# EAGLE board Solarbrain (EAGLE 6.2)
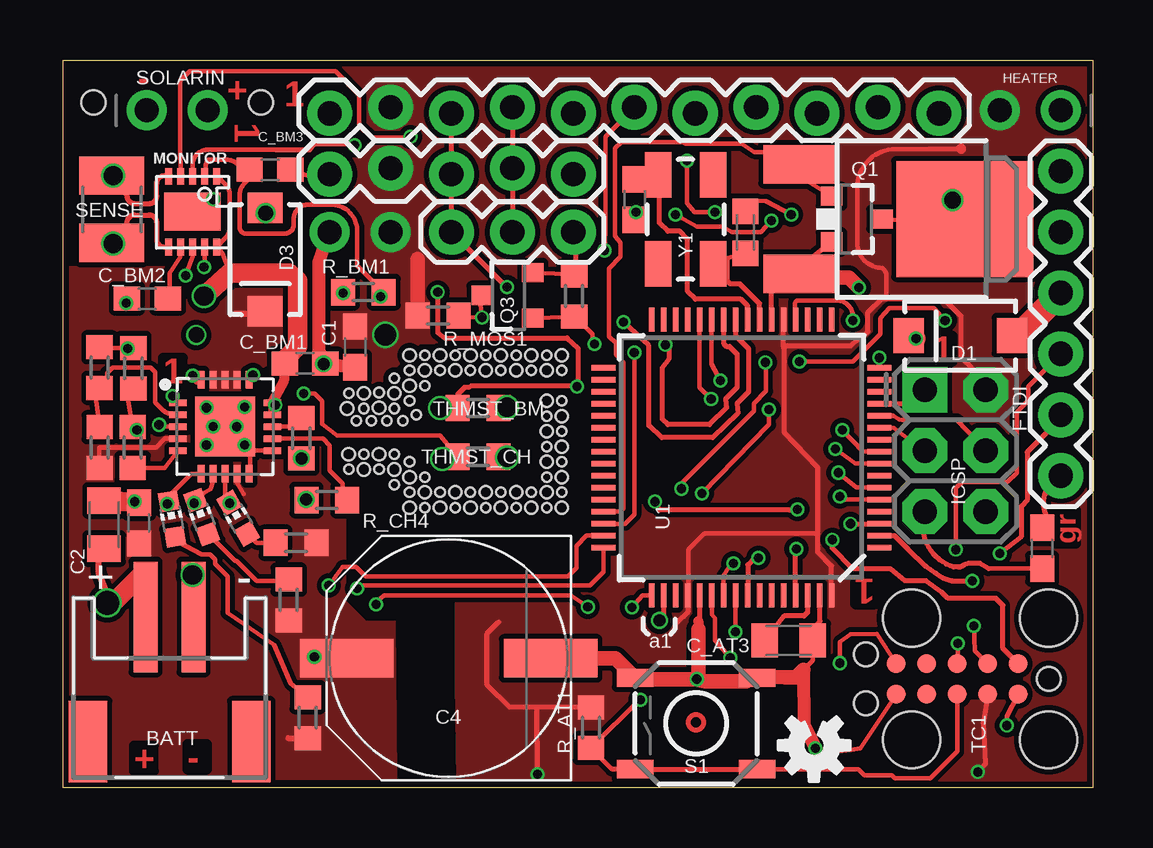
[diagram p0: board, top side]
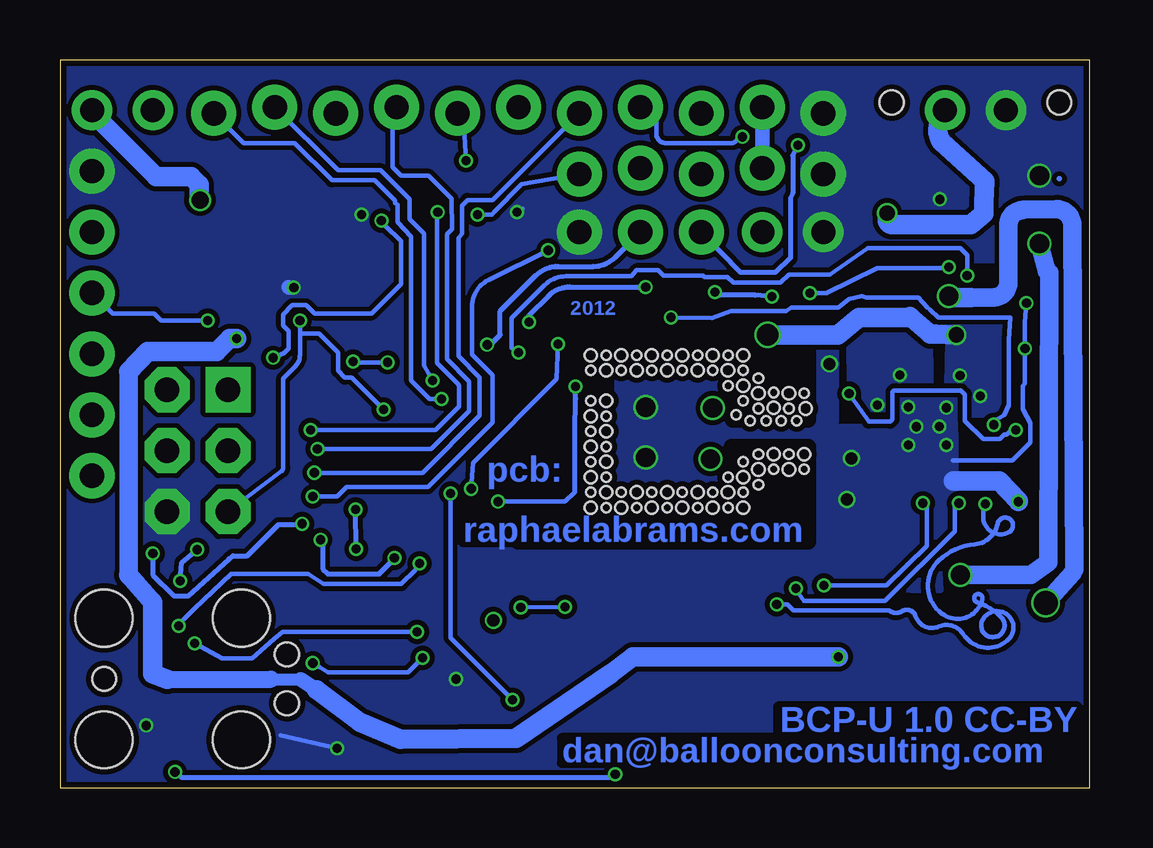
[diagram p1: board, bottom side, seen from below]

Size 42.93 x 30.35 mm. Coordinates in mm from the lower left corner, seen from the top.
Outline: 0,0 0,30.35 42.93,30.35 42.93,0 0,0
Copper layers (1*16): Top 0.035mm / dielectric 1.5mm / Bottom 0.035mm
Design rules: minimum track width 5mil, minimum drill 15mil, track to track 8mil, track to pad 8mil, pad to pad 8mil, via to via 8mil, smd to smd 0mil, copper to edge 10mil, drill to drill 7mil, minimum pad ring 8mil, minimum via ring 4mil, stop-mask expansion 3mil, vias tented up to drill 20mil, thermal gap 5mil
Net classes: 0 default: width 0.178 mm, drill 0.381 mm, clearance 0.178 mm; 1 power: width 0.178 mm, drill 0.381 mm, clearance 0.178 mm
Holes 0.38 mm at 19.53,12.33 20.16,11.69 18.89,11.69 18.26,12.33 16.99,12.33 15.72,12.33 15.08,11.69 17.62,11.69 20.16,12.96 20.16,14.23 14.45,12.33 20.16,15.5 20.16,18.04 18.89,18.04 18.26,17.41 16.35,11.69 17.62,18.04 16.35,18.04 15.08,18.04 14.45,17.41 14.45,16.14 14.45,13.6 15.72,17.41 16.99,17.41 19.53,17.41 13.81,15.82 12.54,15.82 13.81,13.92 12.54,13.92 13.81,17.09 13.81,12.65 20.8,17.41 20.8,16.14 20.8,14.87 20.8,13.6 20.8,12.33 13.18,16.49 11.91,16.46 11.91,13.28 13.18,13.28 15.08,12.96 15.08,16.77 14.16,15.31 14.73,15.57 12.22,15.31 12.86,15.31 13.49,15.31
Holes 0.51 mm at 17.62,12.33 16.35,12.33 15.08,12.33 18.89,12.33 18.26,11.69 16.99,11.69 20.16,12.33 14.45,11.69 14.45,12.96 15.72,11.69 20.16,13.6 20.16,16.14 19.53,18.04 20.16,17.41 18.89,17.41 18.26,18.04 17.62,17.41 19.53,11.69 16.35,17.41 15.72,18.04 16.99,18.04 15.08,17.41 14.45,16.77 13.81,16.46 14.45,18.04 13.81,13.28 13.18,15.85 13.18,13.92 20.16,14.87 20.8,18.04 20.8,15.5 20.8,14.23 20.8,12.96 20.8,11.69 11.84,15.82 11.91,13.92 12.54,16.46 12.54,13.28
Holes 1 mm at 1.27,28.57 8.26,28.57
tRestrict: 1 lines
bRestrict: area 11.7,10.3 to 23.8,19.5

## Footprints (pad centres in the part's own frame; a part is rotated, then mirrored left to right if it is on the bottom)
C0603 = smd 1.1 x 1: 1 -0.85,0; 2 0.85,0
JST-PH-2-SMT-RA = smd 1 x 4.6: 1 1,-3.7; 2 -1,-3.7 | smd 1.6 x 3.4: NC1 -3.4,1.5; NC2 3.4,1.5
C0805K = smd 1.1 x 1.4: 1 -1,0; 2 1,0
PANASONIC_G = smd 3.9 x 1.6: + 4.25,0; - -4.25,0
C0603K = smd 1.05 x 1.08: 1 -0.875,0; 2 0.875,0
CHIP-LED0603 = smd 0.8 x 0.8: A 0,-0.75; C 0,0.75
SMA-DIODE = smd 1.27 x 1.47: A -2.15,0; C 2.15,0
FTDI_BASIC = drill 1.016 pad 1.88: CTS 10.16,0; DTR 0,0; GND 12.7,0; RXI 2.54,0; TXO 5.08,0; VCC 7.62,0
1X02_ROUND = drill 1 pad 1.676: 1 -1.27,0; 2 1.27,0
QFN20_4MM = smd 0.73 x 0.28: P$1 -1.965,1; P$2 -1.965,0.5; P$3 -1.965,0; P$4 -1.965,-0.5; P$5 -1.965,-1; P$11 1.965,-1; P$12 1.965,-0.5; P$13 1.965,0; P$14 1.965,0.5; P$15 1.965,1 | smd 0.28 x 0.73: P$6 -1,-1.965; P$7 -0.5,-1.965; P$8 0,-1.965; P$9 0.5,-1.965; P$10 1,-1.965; P$16 1,1.965; P$17 0.5,1.965; P$18 0,1.965; P$19 -0.5,1.965; P$20 -1,1.965 | smd 2.5 x 2.5: P$21 0,0
2X3-NS = drill 1.016 pad 1.88 square: 1 -2.54,-1.27 | drill 1.016 pad 1.88 octagon: 2 -2.54,1.27; 3 0,-1.27; 4 0,1.27; 5 2.54,-1.27; 6 2.54,1.27
1X03 = drill 1.016 pad 1.88: 1 0,0; 2 2.54,0; 3 5.08,0
1X11_LOCK = drill 1.016 pad 1.88: 1 0,0.127; 2 2.54,-0.127; 3 5.08,0.127; 4 7.62,-0.127; 5 10.16,0.127; 6 12.7,-0.127; 7 15.24,0.127; 8 17.78,-0.127; 9 20.32,0.127; 10 22.86,-0.127; 11 25.4,0.127
1X05_LOCK = drill 1.016 pad 1.88: 1 0,0.127; 2 2.54,-0.127; 3 5.08,0.127; 4 7.62,-0.127; 5 10.16,0.127
TDFN_10_3X3MM = smd 0.7 x 0.295: P$1 -1.5,1; P$2 -1.5,0.5; P$3 -1.5,0; P$4 -1.5,-0.5; P$5 -1.5,-1; P$6 1.45,-1; P$7 1.45,-0.5; P$8 1.45,0; P$9 1.45,0.5; P$10 1.45,1 | smd 1.58 x 2.35: P$11 -0.025,0
SOT23-3 = smd 0.8 x 0.9: 1 -0.95,-1; 2 0.95,-1; 3 0,1.1
DPAK = smd 1.6 x 3: 1 -2.28,-5.31; 3 2.28,-5.31 | smd 4.826 x 5.715: 4 0,1.588
R0603 = smd 1 x 1.1: 1 -0.85,0; 2 0.85,0
TACTILE_SWITCH_SMD = smd 1.524 x 0.762: 1 -2.54,1.905; 2 2.54,1.905; 3 -2.54,-1.905; 4 2.54,-1.905
R3225 = smd 1.6 x 2.7: 1 -1.4,0; 2 1.4,0
TC2050-IDC = smd 0.787 x 0.787: 1 -2.54,-0.635; 2 -2.54,0.635; 3 -1.27,-0.635; 4 -1.27,0.635; 5 0,-0.635; 6 0,0.635; 7 1.27,-0.635; 8 1.27,0.635; 9 2.54,-0.635; 10 2.54,0.635 | hole 0.991: -3.81,0; 3.81,1.016; 3.81,-1.016 | hole 2.375: -3.81,2.54; -3.81,-2.54; 1.905,2.54; 1.905,-2.54
TQFP64 = smd 0.22 x 1: 1 -3.75,-5.75; 2 -3.25,-5.75; 3 -2.75,-5.75; 4 -2.25,-5.75; 5 -1.75,-5.75; 6 -1.25,-5.75; 7 -0.75,-5.75; 8 -0.25,-5.75; 9 0.25,-5.75; 10 0.75,-5.75; 11 1.25,-5.75; 12 1.75,-5.75; 13 2.25,-5.75; 14 2.75,-5.75; 15 3.25,-5.75; 16 3.75,-5.75; 33 3.75,5.75; 34 3.25,5.75; 35 2.75,5.75; 36 2.25,5.75; 37 1.75,5.75; 38 1.25,5.75; 39 0.75,5.75; 40 0.25,5.75; 41 -0.25,5.75; 42 -0.75,5.75; 43 -1.25,5.75; 44 -1.75,5.75; 45 -2.25,5.75; 46 -2.75,5.75; 47 -3.25,5.75; 48 -3.75,5.75 | smd 1 x 0.22: 17 5.75,-3.75; 18 5.75,-3.25; 19 5.75,-2.75; 20 5.75,-2.25; 21 5.75,-1.75; 22 5.75,-1.25; 23 5.75,-0.75; 24 5.75,-0.25; 25 5.75,0.25; 26 5.75,0.75; 27 5.75,1.25; 28 5.75,1.75; 29 5.75,2.25; 30 5.75,2.75; 31 5.75,3.25; 32 5.75,3.75; 49 -5.75,3.75; 50 -5.75,3.25; 51 -5.75,2.75; 52 -5.75,2.25; 53 -5.75,1.75; 54 -5.75,1.25; 55 -5.75,0.75; 56 -5.75,0.25; 57 -5.75,-0.25; 58 -5.75,-0.75; 59 -5.75,-1.25; 60 -5.75,-1.75; 61 -5.75,-2.25; 62 -5.75,-2.75; 63 -5.75,-3.25; 64 -5.75,-3.75
CRYSTAL-SMD-5X3 = smd 1.9 x 1.1: 1 -1.85,-1.15; 2 1.85,-1.15; 3 1.85,1.15; 4 -1.85,1.15

## Placement (x,y rotation side)
AUTORESET  .1uf  [C0603]  40.81,9.99 90 top
BATT  [JST-PH-2-SMT-RA]  4.45,3.43 180 top
C1  10uF  [C0603]  12.17,18.39 270 top
C2  10uF  [C0805K]  1.71,10.98 90 top
C3  10uF/10V  [C0603]  3.17,11.05 90 top
C4  4700uF/10V  [PANASONIC_G]  16.08,5.41 180 top
C_AT1  22pf  [C0603K]  28.45,23.17 90 top
C_AT2  22pf  [C0603]  23.83,24.53 270 top
C_AT3  10uF  [C0805K]  30.25,6.15 0 top
C_BM1  .1uF/10V  [C0603]  10.09,17.69 0 top
C_BM2  .1uF/10V  [C0603]  3.52,20.41 180 top
C_BM3  10uF/10V  [C0603]  8.63,25.77 0 top
CHRG/LBO  ORANGE  [CHIP-LED0603]  7.3,11.24 30 top
D1  1amp  [SMA-DIODE]  37.4,18.86 180 top
D3  3amp  [SMA-DIODE]  8.43,22.03 270 top
DONE  GREEN  [CHIP-LED0603]  5.78,11.29 20 top
FTDI  FTDI_BASICPTH  [FTDI_BASIC]  41.59,13.02 90 top
HEATER  [1X02_ROUND]  40.32,28.26 180 top
IC1  MCP73871  [QFN20_4MM]  6.76,15.06 0 top
ICSP  AVR_SPI_PRG_6NS  [2X3-NS]  37.19,14.06 270 top
JP1  [1X03]  21.27,23.18 180 top
JP3  M11LOCK  [1X11_LOCK]  36.51,28.26 180 top
JP8  [1X05_LOCK]  21.27,25.72 180 top
LOAD  [1X02_ROUND]  12.38,23.18 180 top
MONITOR  MAX17047_17050_BATTERY_GAS_GAUGE  [TDFN_10_3X3MM]  5.4,24 270 top
PWR  RED  [CHIP-LED0603]  4.54,11.21 10 top
Q1  MOSFET-NCHANNELSMD  [SOT23-3]  33.04,23.72 270 top
Q2  MOSFET-NCHANNELFDD8580  [DPAK]  36,23.72 270 top
Q3  MOSFET-NCHANNELSMD  [SOT23-3]  18.57,20.54 90 top
R_AT1  1K  [R0603]  22.01,2.52 90 top
R_BM1  1K  [R0603]  12.52,20.67 180 top
R_CH1  270K  [R0603]  1.53,14.2 270 top
R_CH2  100K  [R0603]  1.52,17.53 90 top
R_CH3  1k  [R0603]  9.94,14.58 90 top
R_CH4  100K  [R0603]  10.99,12 0 top
R_CH5  1K  [R0603]  2.9,14.19 90 top
R_CH6  150K  [R0603]  2.93,17.5 270 top
R_LED1  1K  [R0603]  9.71,10.23 0 top
R_LED2  1K  [R0603]  9.41,7.84 270 top
R_LED3  1K  [R0603]  10.2,2.93 270 top
R_MOS1  1K  [R0603]  15.63,19.7 180 top
R_MOS2  1K  [R0603]  21.3,20.51 270 top
S1  [TACTILE_SWITCH_SMD]  26.39,2.69 180 top
SENSE  [R3225]  2.03,24.13 270 top
SOLARIN  DCIN  [1X02_ROUND]  4.76,28.26 0 top
TC1  TC2050-IDC  [TC2050-IDC]  37.28,4.55 180 top
THMST_BM  [R0603]  17.3,15.84 0 top
THMST_CH  [R0603]  17.3,13.81 180 top
U1  ATMEGA128_SMD  [TQFP64]  28.29,13.77 90 top
U$1  [OSHW-LOGO-S]  31.31,1.78 180 top
Y1  [CRYSTAL-SMD-5X3]  25.95,23.71 270 top

## Library data of the parts
AUTORESET BATT C1-C4 C_AT1-C_AT3 C_BM1-C_BM3 CHRG/LBO DONE IC1 PWR R_AT1 R_BM1 R_CH1-R_CH6 R_LED1-R_LED3 R_MOS1 R_MOS2 = adafruit
D1 D3 FTDI ICSP JP1 JP3 JP8 Q1-Q3 S1 U1 U$1 Y1 = SparkFun2011
HEATER LOAD SOLARIN = microbuilder
MONITOR = RaphaelBigLibrary
SENSE THMST_BM THMST_CH = rcl
TC1 = TagConnect

## Nets
3.3V [power]: C1.1 HEATER.2 IC1.P$1 IC1.P$20 ICSP.2 JP3.10 JP8.4 LOAD.1 R_AT1.2 R_MOS1.2 TC1.4 U1.21 U1.52 U1.64
#PG: IC1.P$6 PWR.C U1.49
BATT [power]: BATT.1 C2.1 C_BM1.1 IC1.P$14 IC1.P$15 IC1.P$16 MONITOR.P$1 MONITOR.P$10
CSP [power]: BATT.2 MONITOR.P$6 SENSE.2
DTR [power]: AUTORESET.2 FTDI.DTR
GND [power]: C1.2 C2.2 C3.2 C4.- C_AT1.2 C_AT2.2 C_AT3.2 C_BM1.2 C_BM2.2 C_BM3.2 FTDI.GND IC1.P$10 IC1.P$11 IC1.P$21 ICSP.6 JP1.1 JP3.11 JP8.5 LOAD.2 MONITOR.P$5 MONITOR.P$11 Q1.2 Q2.3 Q3.2 R_CH2.2 R_CH3.1 R_CH4.1 R_CH6.1 R_MOS2.1 S1.3 S1.4 SENSE.1 SOLARIN.1 TC1.2 TC1.10 THMST_BM.2 THMST_CH.1 U1.22 U1.53 U1.63
MISO [power]: ICSP.1 U1.13
MOSI [power]: ICSP.4 U1.12
N$2 [power]: D1.A FTDI.VCC Q3.1 R_MOS2.2
N$3 [power]: C_AT1.1 U1.23 Y1.3
N$5: IC1.P$5 R_CH5.1
N$8: R_CH5.2 R_CH6.2 THMST_CH.2
N$9 [power]: C_AT2.1 U1.24 Y1.1
N$12: CHRG/LBO.A R_LED1.1
N$13: DONE.A R_LED2.1
N$14: PWR.A R_LED3.1
N$19 [power]: MONITOR.P$8 U1.46
N$20 [power]: C_AT3.1 U1.62
N$21 [power]: HEATER.1 Q1.3 Q2.4
N$22 [power]: MONITOR.P$9 R_BM1.2
N$24 [power]: D3.A SOLARIN.2
N$26 [power]: C_BM2.1 MONITOR.P$7
PROG1: IC1.P$13 R_CH3.2
PROG3: IC1.P$12 R_CH4.2
PWR_EN: JP3.3
RESET [power]: AUTORESET.1 ICSP.5 R_AT1.1 S1.1 S1.2 TC1.6 U1.20
RX [power]: FTDI.RXI U1.3
SAT_CTS: JP3.7 U1.6
SAT_NA [power]: JP3.5 U1.9
SAT_RI [power]: JP3.4 U1.8
SAT_RTS [power]: JP3.6 U1.5
SCK [power]: ICSP.3 U1.11
SCL [power]: JP1.3 JP3.9 JP8.3 MONITOR.P$3 U1.25
SDA [power]: JP1.2 JP3.8 JP8.2 MONITOR.P$4 U1.26
SEL [power]: IC1.P$3 Q3.3 R_MOS1.1
SER_FROM_SAT: JP3.2 U1.27
SER_TO_SAT: JP3.1 U1.28
SLEEP: JP8.1 U1.16
STAT1: CHRG/LBO.C IC1.P$8 U1.47
STAT2: DONE.C IC1.P$7 U1.48
TCK [power]: TC1.1 U1.57
TDI [power]: TC1.9 U1.54
TDO [power]: TC1.3 U1.55
THE_HEAT_ON [power]: Q1.1 Q2.1 U1.45
THERM_ANALOG [power]: C_BM3.1 MONITOR.P$2 R_BM1.1 THMST_BM.1 U1.61
TMS [power]: TC1.5 U1.56
TX [power]: FTDI.TXO U1.2
VCC [power]: C3.1 C4.+ D1.C D3.C IC1.P$4 IC1.P$9 IC1.P$17 IC1.P$18 IC1.P$19 R_CH1.2 R_LED1.2 R_LED2.2 R_LED3.2
VPCC: IC1.P$2 R_CH1.1 R_CH2.1

## Tracks (layer width: path | path; a pad name or v marks a point on that pad's centre or on a via)
3.3V  (via drill 0.38, 0.64, 0.9)
  Top 0.178: 26.07,7.99 26.07,9.94 26.73,10.6 31.37,10.6 31.46,10.51 | 36.1,26.64 34.7,26.64 arc90 33.12,25.05 33.12,22.7 arc90 34.13,21.68 34.14,21.68 arc-45 34.32,21.42 34.32,20.41
  Top 0.203: R_AT1.2 19.75,3.37 | 19.75,3.37 18.6,3.37 17.68,4.29 17.68,6.45 18.16,6.92 | 25.62,6.92 26.07,7.37 26.07,7.99 U1.52 | 37.43,26.64 36.1,26.64 | 30.04,18.45 U1.21 | U1.64 32.04,9.27 31.46,9.84 31.46,10.51 31.46,13.37 30.07,14.83 30.07,18.29 30.04,18.45 | 30.04,18.45 32.83,18.45 33.56,19.02 33.56,19.84 34.13,20.41 34.32,20.41 36.7,20.41 37.43,19.68 37.43,17.97 37.88,17.53 37.88,17.19 ICSP.2 | TC1.4 38.35,2.7 38.45,1.02 v38.13,0.67 | v19.78,0.57 19.75,3.37
  Top 0.305: IC1.P$20 5.6,16.97 v5.41,17.19 | IC1.P$1 4.66,16.09 v4.57,16.35
  Top 0.406: 37.43,26.64 37.43,26.67
  Top 0.61: R_MOS1.2 14.78,22.05
  Top 0.813: R_MOS1.2 14.71,19.79
  Bottom 0.178: 13.68,28.42 JP3.10
  Bottom 0.203: v38.13,0.67 37.85,0.45 20,0.45 v19.78,0.57
  Bottom 0.406: 13.68,28.42 13.72,28.38
  Bottom 0.61: JP3.10 JP8.4
  Bottom 0.813: v13.43,18.89 10.51,18.89 9.62,19.62 7.49,19.62 7.49,19.65 6.64,18.92 6.45,18.92 v5.56,18.89
  pour Bottom (no thermals): 0.73,21.52 5.88,21.44 5.97,16.81 5.18,16.81 4.94,16.49 4.94,15.54 0.71,15.53 0.71,17.43
  pour Top (isolate 0.203, no thermals): 17.75,0.29 16.45,0.25 16.38,4.41 16.38,9.65 17.75,11.02 20.95,11.02 21.81,11.87 21.81,17.62 20.89,18.54 14.89,18.54 12.76,16.41 11.21,16.41 11.21,16.92 11.18,21.27 9.4,22.96 9.33,28.92 10.7,30.29 42.83,30.29 42.89,30.23 42.89,0.19 42.77,0.06 18.48,0.06 18.26,0.29
#PG  (via drill 0.38)
  Top 0.178: IC1.P$6 5.35,13.1 4.51,12.26 4.51,11.95 PWR.C 4.46,11.94 v4.35,11.84 | U1.49 24.15,8.02 v23.72,7.53 | v21.88,7.56 21.18,8.03 13.38,8.02 13.24,7.91 v13.05,7.65
  Bottom 0.178: v23.72,7.53 v21.88,7.56 | v13.05,7.65 12.61,7.65 12.35,7.4 8.35,7.4 arc-77 7.84,7.37 arc107 7.27,7.18 arc-95 6.29,6.73 arc81 5.27,6.41 arc-104 3.37,6.22 arc-198 4.48,6.99 arc-249 3.68,7.11 arc-29 4.7,7.75 arc265 4.48,7.87 arc109 6.06,7.21 arc106 6.29,9.49 arc37 4.79,10.16 arc-73 3.84,11.02 arc229 3.37,10.67 arc119 4.45,11.3 4.45,11.95 4.47,11.95 v4.35,11.84
BATT  (via drill 0.38, 0.8, 1)
  Top 0.178: v8.85,15.97 IC1.P$14 | 6.95,21.46 6.73,22.05 arc36 6.55,22.4 MONITOR.P$10 6.77,22.92 arc45 6.95,23.37 6.95,24.72 arc45 6.77,25.17 6.44,25.5 MONITOR.P$1
  Top 0.254: C2.1 1.42,9.93 1.39,10.08 1.49,10.06 1.49,8.98 1.77,8.26 v1.84,7.72
  Top 0.305: IC1.P$16 7.75,17.06 v7.92,17.22 | IC1.P$14 IC1.P$15
  Top 0.406: 9.21,17.6 9.21,16.99 IC1.P$15
  Top 0.762: BATT.1 3.41,9.03 2.24,7.86 arc9 1.85,7.57 v1.84,7.72
  Top 0.813: C_BM1.1 9.21,17.6 9.21,17.84 9.78,18.41 9.78,21.14 9.43,21.46 6.95,21.46 v5.87,20.51
  Bottom 0.178: 5.82,20.46 v5.87,20.51
  Bottom 0.762: v1.84,7.72 0.73,8.96 0.64,9.11 0.73,23.42 arc-90 1.36,24.14 2.76,24.1 arc-90 3.39,23.47 3.39,21.09 arc90 3.99,20.46 4.95,20.46
  Bottom 0.813: 4.95,20.46 5.82,20.46
  pour Bottom (no thermals): 6.6,16.81 6.64,21.44 9.18,21.44 arc-45 9.63,21.26 9.93,21.34 arc-45 10.11,20.89 10.01,15.78 8.43,15.78 8.43,16.81 7.08,16.81
CSP  (via drill 0.8)
  Top 0.203: SENSE.2 2.67,23.57 arc-90 2.98,23.89 3.59,23.89 arc-90 3.9,23.57 3.9,22.86 arc91 4.26,22.55 MONITOR.P$6
  Top 0.254: BATT.2 5.44,7.14 5.44,8.87 v5.41,8.89 v5.4,8.89
  Top 0.762: v2.1,22.7 SENSE.2
  Bottom 0.762: v5.4,8.89 2.46,8.89 1.73,9.4 1.7,21.48 arc-7 1.78,21.56 v2.1,22.7
DTR
  Top 0.203: AUTORESET.2 41,11.32 arc-90 FTDI.DTR
GND  (via drill 0.38, 0.5, 0.8)
  Top 0.178: IC1.P$11 7.8,14.06 | 7.8,14.06 v7.57,14.3 | TC1.10 33.24,1.65 arc-23 v31.37,1.65 | v39.34,2.6 39.34,2.99 TC1.2 | 7.8,14.06 7.8,13.14 IC1.P$10 | Q3.2 21.39,21.4 R_MOS2.1 | C_BM1.2 10.85,17.63 v10.86,17.68 | v9.94,13.75 R_CH3.1 | R_CH4.1 10.14,12.02 v10.13,12.03 | C_BM3.2 10.27,25.52 JP8.5 | C_AT1.2 28.7,24.48 29.31,24.48 v30.35,23.91 | C_AT2.2 23.83,24.02 v23.88,24 | v2.63,20.23 2.57,20.26 C_BM2.2 | R_CH6.1 2.77,18.19 | 2.77,18.19 2.77,18.15 | 2.77,18.19 2.68,18.28 2.68,18.32 2.77,18.32 | v2.7,18.32 2.93,18.59 R_CH6.1 | R_CH2.2 1.55,18.35 R_CH6.1 | 31.56,6.95 31.25,6.65 C_AT3.2 31.25,5.31 30.86,4.92
  Top 0.203: SENSE.1 2.67,24.69 arc90 2.98,24.37 3.62,24.37 arc90 3.9,24.69 3.9,25.21 arc-95 4.28,25.53 MONITOR.P$5 | v5.98,14.3 IC1.P$21 | MONITOR.P$11 5.25,23.77 v6.25,24.54 | C_BM2.2 2.73,20.57 | U1.53 26.54,6.96 26.48,6.95 | 31.56,6.95 31.56,8 U1.63 | U1.22 29.54,20.7 Q2.3 30.17,21.28 Q1.2 | 23.85,23.95 C_AT2.2 | 21.39,21.4 21.36,23.09 | THMST_BM.2 v18.51,15.88 | THMST_CH.1 18.48,13.81 v18.51,13.78
  Top 0.254: 9.27,25.73 C_BM3.2
  Top 0.3: IC1.P$21 7.1,15.6
  Top 0.406: 26.48,6.95 26.48,6.6 | 21.36,23.09 21.27,23.09 JP1.1
  Top 0.533: 30.86,4.92 30.89,2.63 v31.37,1.65 | LOAD.2 10.67,21.94 10.67,18.19 C_BM1.2 C1.2
  Top 0.61: 2.71,20.41 C_BM2.2 | C4.- 23.03,5.41 S1.4 24.1,4.54 26.07,4.54 26.35,4.53 | 26.35,4.53 26.77,4.45 28.48,4.45 S1.3 29.01,4.63 30.1,4.6 30.54,4.6 30.86,4.92 | 26.48,6.6 26.48,4.75 26.35,4.53 | 30.17,21.28 32.76,21.28 v33.18,20.86 | 26.35,4.53 26.36,4.54 v26.42,4.54
  Top 0.762: SENSE.1 v2.1,25.53
  Top 0.813: C2.2 2.83,11.92 C3.2 2.9,11.9 v2.98,11.94
  Bottom 0.178: v31.37,1.65 33.72,2.19 | 5.71,13.65 3.24,13.65 2.48,14.41 2.48,15.21 2.77,15.76 2.79,15.78 2.79,16.76 2.7,16.86 v2.7,18.32 2.7,19.41 v2.63,20.23 | v23.88,24 23.65,24.16 23.69,24.13
  Bottom 0.203: v18.51,15.88 18.57,15.84 18.67,15.91 | v18.51,13.78 18.73,13.78
  Bottom 0.61: v33.18,20.86 33.37,20.86 33.4,20.89
  Bottom 0.762: v2.1,25.53 2.16,25.56
  Bottom 0.813: v2.98,11.94 2.98,11.97 3.78,12.79 5.68,12.79
  other vias: 5.98,15.86 7.57,15.89 7.23,15.06 6.26,15.08
  pour Bottom (isolate 0.203, no thermals): -0.54,0 -0.46,8.48 1.98,8.48 5.39,8.48 10.54,8.56 10.48,21.92 7.86,21.92 -0.14,21.92 -0.1,30.18 42.68,30.18 42.78,0
  pour Bottom (no thermals): 7.95,15.07 9.69,15.07 10.49,15.07 10.54,9.67 10.54,8.48 7.45,8.24 6.18,8.24 6.26,9.83 5.55,10.54 5.57,16.26 7.87,16.26 7.87,15.31 7.87,15.15
MISO
  Top 0.203: U1.13 35.59,16.02 ICSP.1
MOSI
  Top 0.178: 34.58,15.52 34.86,15.37 34.99,15.34 37.26,15.34 ICSP.4
  Top 0.203: U1.12 34.58,15.52
N$1
  Top 0.203: 25.02,8 25.02,7.18 24.86,7.05
N$2  (via drill 0.38)
  Top 0.178: Q3.1 21.05,19.62 R_MOS2.2 21.33,19.66 22.07,18.92 22.07,18.61 v22.16,18.51 | v25.78,12.48 25.78,12.7 28.8,15.72 28.8,16.03 29.3,16.54 29.3,17.72 v29.27,17.75 | v30.7,17.78 32.92,17.78 34.07,18.92 34.07,19.59 34.45,20 36.29,20 v36.77,19.49
  Top 1.016: D1.A 39.81,18.86 FTDI.VCC
  Bottom 0.178: v22.16,18.51 22.23,17.05 25.72,13.56 v25.78,12.48 | v29.27,17.75 30.67,17.75 v30.7,17.78 | v36.77,19.49 38.7,19.49 38.99,19.78 40.73,19.78 FTDI.VCC
N$3
  Top 0.178: 27.69,21.82 27.69,22.09 C_AT1.1
  Top 0.203: U1.23 29.04,20.21 28.23,21.02 27.81,21.02 27.69,21.14 27.69,21.82 Y1.3 27.28,21.5
N$4  (via drill 0.51)
  other vias: 24.86,6.99
N$5
  Top 0.178: R_CH5.1 4.23,13.34 IC1.P$5
N$8  (via drill 0.38, 0.8)
  Top 0.178: R_CH6.2 2.71,16.14 R_CH5.2 2.96,15.04 v3.08,14.92 | v10.03,16.45 10.48,16.45 10.79,16.13 10.79,15.18 11.43,14.7 15.72,14.7 THMST_CH.2 16.45,13.75 16.45,13.37 16.41,13.37 v15.81,13.72
  Bottom 0.178: v3.08,14.92 3.27,14.92 3.46,14.73 3.56,14.73 3.75,14.54 4.45,14.54 5.21,15.3 5.21,16.41 5.37,16.57 8.16,16.57 8.22,16.51 8.22,15.37 8.32,15.27 9.21,15.27 v10.03,16.45
N$9
  Top 0.203: U1.24 28.54,20.1 28.26,20.38 26.35,20.38 26.04,20.7 26.04,22.89 | 26,22.89 26.04,22.89 | 26.04,22.89 25.72,23.21 25.21,23.21 24.86,23.56 24.86,24.61 Y1.1 25.02,25.56 24.96,25.5 24.32,25.5 C_AT2.1
N$12
  Top 0.178: CHRG/LBO.A 7.57,10.72 8.06,10.22 R_LED1.1
N$13
  Top 0.178: DONE.A 6.18,10.46 7.18,9.46 7.24,9.46 8.06,8.64 9.36,8.64 R_LED2.1
N$14
  Top 0.178: PWR.A 4.8,10.25 5.78,9.75 6.13,9.75 6.35,9.53 6.35,9.34 6.86,8.83 6.86,7.3 8.79,5.97 9.49,4.36 R_LED3.1
N$19  (via drill 0.38)
  Top 0.178: MONITOR.P$8 5.4,22.16 5.21,21.65 5.11,21.43 v5.11,21.37 | v23.81,18.16 23.81,11.4 23.43,11.02 U1.46
  Bottom 0.178: v5.11,21.37 5.11,22.23 5.4,22.51 9.24,22.51 10.83,21.4 12.54,21.4 12.89,21.08 14.86,21.08 15.11,21.3 16.07,21.3 16.13,21.37 17.78,21.37 18,21.59 18.89,21.59 19.11,21.34 21.83,21.34 arc-45 22.72,20.96 24.1,19.59 24.1,18.35 v23.81,18.16
N$20
  Top 0.203: U1.62 31.04,7.32 30.89,7.18 30.05,7.18 C_AT3.1
N$21  (via drill 0.7)
  Top 0.178: Q1.3 37.02,23.56
  Top 0.203: 37.02,23.56 Q2.4
  Top 0.813: v37.08,24.51 37.08,23.63 Q2.4
  Bottom 0.178: 41.59,28.16 HEATER.1
  Bottom 0.813: 41.59,28.16 38.92,25.5 37.47,25.5 37.12,25.15 37.12,24.54 v37.08,24.51
N$22  (via drill 0.38)
  Top 0.178: 11.43,20.61 11.67,20.66 R_BM1.2 v11.67,20.64 | MONITOR.P$9 5.9,21.77 v5.87,21.72
  Bottom 0.178: v5.87,21.72 5.91,21.75 6.03,21.68 8.86,21.68 10.99,20.64 v11.67,20.64
N$24  (via drill 0.64)
  Top 0.813: D3.A arc-90 8.45,24.16 v8.45,23.97
  Bottom 0.813: SOLARIN.2 6.03,28.04 arc-90 6.16,26.92 4.38,25.3 4.41,24.42 4.41,23.94 4.95,23.5 8.22,23.5 arc90 8.45,23.72 v8.45,23.97
N$26
  Top 0.178: C_BM2.1 4.37,20.37 4.45,20.86 4.45,21.46 4.89,22.13 4.9,22.38 MONITOR.P$7
PROG1
  Top 0.178: IC1.P$13 9.57,15.06 R_CH3.2
PROG3
  Top 0.178: IC1.P$12 10.84,14.56 11.11,14.29 11.11,13.24 11.65,12.7 11.65,12.19 R_CH4.2
RESET  (via drill 0.38)
  Top 0.178: TC1.6 37.28,3.88 | TC1.6 37.39,3.66 | S1.1 33.16,0.79 33.4,0.54 34.54,0.54 34.67,0.41 36.16,0.41 37.27,1.52 TC1.6 | v32.92,19.49 32.92,19.65 arc90 32.29,20.32 30.64,20.32 arc90 30.51,20.19 30.51,19.55 arc90 U1.20 | v24.07,3.68 24.02,3.68 R_AT1.1 22.89,0.79 | v26.64,12.29 29.43,15.14 v29.43,15.78
  Top 0.203: S1.1 S1.2 22.89,0.79 | AUTORESET.1 38.58,9.14 arc45 38.58,9.14 38.23,9.37 37.75,9.37 37.56,9.3 arc-45 37.33,9.21 37.13,9.21 arc-90 ICSP.5
  Bottom 0.178: ICSP.5 33.69,13.21 arc-45 33.62,13.36 33.62,17.08 33.11,17.59 arc-45 32.92,18.04 32.92,18.95 | 32.92,18.95 v32.92,19.49 | v24.07,3.68 26.64,6.25 v26.64,12.29 | v29.43,15.78 30.77,17.11 31.05,17.11 31.34,17.4 31.34,18.16 32.13,18.95 32.92,18.95
RX  (via drill 0.38)
  Top 0.203: FTDI.RXI 41.59,15.4 40.2,14 40.2,12 39.94,11.75 39.94,10.48 v39.05,9.78 | v32.83,11.02 U1.3
  Bottom 0.203: v39.05,9.78 39.05,8.89 38.16,8 37.59,8 35.88,9.56 35.72,9.68 35.12,9.68 33.81,10.99 32.86,10.99 v32.83,11.02
SAT_CTS  (via drill 0.38)
  Top 0.178: U1.6 33.07,12.52 v32.32,13.14
  Bottom 0.178: v32.32,13.14 27.81,13.14 25.43,15.53 25.43,17.11 26.32,18 26.32,22.92 26.16,23.11 26.16,24.29 25.94,24.51 24.89,24.51 JP3.7
SAT_NA  (via drill 0.38)
  Top 0.178: U1.9 33.35,14.02 v32.48,14.92 | v27.18,24 26.32,24 26,24.38 v26,26.16 26.1,26.23
  Bottom 0.178: v32.48,14.92 27.27,14.92 26.29,15.91 26.29,16.76 26.32,16.8 26.32,16.83 27.21,17.72 27.21,23.56 v27.18,24 | v26,26.16 26.1,27.88 JP3.5
SAT_RI  (via drill 0.38)
  Top 0.178: U1.8 33.03,13.52 v32.19,14.13
  Bottom 0.178: v32.19,14.13 27.46,14.13 25.88,15.72 25.88,16.95 26.8,17.88 26.8,23.08 26.57,23.3 26.61,24.57 27.56,25.53 28.7,25.53 29.05,25.88 29.05,28.23 JP3.4
SAT_RTS  (via drill 0.38)
  Top 0.178: U1.5 32.52,12.02 v32.38,12.16 | v22.57,22.42 22.61,23.21 22.61,27.15 JP3.6
  Bottom 0.178: v32.38,12.16 31.37,12.16 30.99,12.54 27.59,12.54 24.89,15.24 24.89,17.21 25.75,18.07 25.75,20.06 arc63 25.07,21.18 v22.57,22.42
SCK
  Top 0.178: U1.11 34.64,15.02 35.15,14.61 ICSP.3
SCL  (via drill 0.38)
  Top 0.178: MONITOR.P$3 arc90 MONITOR.P$3 | MONITOR.P$3 5.4,25.97 arc-90 6.03,26.61 8.87,26.61
  Top 0.203: U1.25 28.04,18.86 28.57,18.32 28.57,16.51 28.1,16.03 28.13,15.62 27.08,14.61 24.96,14.61 24.42,15.11 24.42,18.45 v23.37,19.43 | v18.51,20.89 18.48,20.89 JP1.3 JP8.3 JP3.9 | 8.87,26.61 10.29,26.61 10.51,26.86 12,26.86 v12.16,26.8
  Bottom 0.203: v23.37,19.43 23.37,19.72 22.57,20.52 arc45 21.67,20.89 v18.51,20.89 | JP1.3 14.54,21.5 13.11,21.5 12.48,22.1 12.48,24.61 12.38,24.8 12.38,26.38 v12.16,26.8
SDA  (via drill 0.38)
  Top 0.178: MONITOR.P$4 4.9,25.9 4.89,26.42 4.89,29.5 5.27,29.88 11.37,29.88 12.35,28.89 12.35,27.62 12.86,27.11 14.57,27.11 v14.48,27.15
  Top 0.203: JP3.8 JP8.2 JP1.2 | U1.26 27.54,18.53 27.65,18.41 27.78,18.41 28.1,18.1 28.1,16.7 27.62,16.22 27.65,15.84 26.96,15.14 25.21,15.14 24.99,15.37 24.99,17.53 25.27,17.91 25.27,18.32 v25.11,18.48
  Bottom 0.178: v14.48,27.15 14.67,27.11 arc90 15.02,26.89 17.68,26.89 arc90 18.07,27.27 18.07,28.1 arc-90 18.35,28.38 JP3.8
  Bottom 0.203: v25.11,18.48 24.96,18.51 24.57,18.89 24.57,19.88 23.07,21.38 arc45 22.18,21.75 20.69,21.75 arc-45 19.79,22.12 JP1.2
SEL  (via drill 0.38)
  Top 0.178: IC1.P$3 4.08,15.06 v4,15.14 | Q3.3 17.38,20.35 v17.46,19.62 16.53,19.63 R_MOS1.1
  Bottom 0.178: v4,15.14 3.87,15.37 3.56,15.56 3.37,15.97 3.37,18.67 3.3,19.62 6.32,19.62 6.67,19.94 6.76,20.03 7.14,20.45 9.3,20.45 9.49,20.51 10.03,20.38 10.48,20.03 12.45,20.03 12.67,19.88 14.95,19.88 15.75,19.59 v17.46,19.62
SER_FROM_SAT  (via drill 0.38)
  Top 0.178: U1.27 27.04,17.67 v27.4,16.99
  Bottom 0.178: v27.4,16.99 27.56,17.27 27.75,17.62 27.75,23.11 28.35,23.72 28.35,24.54 29.56,25.75 31.34,25.75 JP3.2
SER_TO_SAT  (via drill 0.38)
  Top 0.178: U1.28 26.54,16.71 v27.02,16.22
  Bottom 0.178: v27.02,16.22 27.53,16.22 28.29,16.99 28.29,22.99 28.86,23.59 28.86,24.32 28.96,24.38 28.96,24.48 29.81,25.34 31.59,25.34 33.15,26.89 35.27,26.89 JP3.1
SLEEP  (via drill 0.38)
  Top 0.178: U1.16 v34.04,17.94 | v29.53,23.65 29.08,23.18 27.88,23.18 27.5,23.4 26.42,23.4 v25.53,23.91
  Bottom 0.178: v34.04,17.94 33.59,18.13 33.4,18.32 33.4,19.05 33.62,19.27 33.62,19.75 33.24,20.13 32.67,20.13 32.32,19.78 29.94,19.78 28.7,21.02 28.7,22.8 29.4,23.46 v29.53,23.65 | JP8.1 23.69,25.18 24.83,24 24.92,23.91 v25.53,23.91
STAT1  (via drill 0.38)
  Top 0.178: 6.76,12.12 6.68,12.04 CHRG/LBO.C | IC1.P$8 6.76,12.01 | 6.76,12.01 CHRG/LBO.C | 6.76,12.01 6.76,11.96 6.67,11.87 | v6.95,11.87 6.92,11.96 CHRG/LBO.C | U1.47 21.82,10.52 21.4,10.1 21.4,9.18 21.05,8.83 12.61,8.83 12.22,9.21 11.65,9.21 11.37,8.83 11.08,8.41 v11.08,8.45
  Bottom 0.178: v11.08,8.45 8.48,8.45 6.79,10.1 6.79,11.91 v6.95,11.87
STAT2  (via drill 0.38)
  Top 0.178: 5.74,11.84 DONE.C | IC1.P$7 6.26,12.8 6.16,12.48 5.84,12.28 DONE.C | v5.46,11.87 5.65,11.87 DONE.C | U1.48 22.54,9.01 21.97,8.45 12.29,8.45 v12.26,8.32 12.22,8.38
  Bottom 0.178: v12.26,8.32 12.13,8.1 11.91,7.81 8.54,7.81 5.62,10.7 5.62,11.81 v5.46,11.87
TCK  (via drill 0.38)
  Top 0.203: TC1.1 39.18,5.82 39.18,7.62 38.89,7.91 36.89,7.91 36.64,8.16 35.97,8.64 35.08,8.64 34.48,9.14 32.92,9.14 32.07,10 v32.07,10.35 | v28.99,9.59 28.83,9.59 28.54,9.3 U1.57
  Bottom 0.203: v32.07,10.35 31.97,10.32 31.97,9.14 31.75,8.92 29.62,8.92 28.96,9.59 v28.99,9.59
TDI  (via drill 0.38)
  Top 0.178: TC1.9 33.92,6.42 32.83,6.41 32.38,6.1 v32.38,5.21 | v27.81,5.43 27.18,6.16 27.18,7.08 27.05,7.24 27.05,8.01 U1.54
  Bottom 0.178: v32.38,5.21 32.13,5.05 31.75,4.83 28.42,4.83 v27.81,5.43
TDO  (via drill 0.38)
  Top 0.178: TC1.3 38.01,5.73 v37.97,6.76 | v27.94,9.37 28.01,9.39 27.94,9.45 27.65,9.05 27.56,8.89 27.53,8.83 U1.55
  Bottom 0.178: v37.97,6.76 37.88,6.86 37.97,6.73 37.97,6.83 37.34,7.46 35.78,8.92 32.58,8.92 31.94,8.51 28.7,8.51 28.13,9.08 v27.94,9.37
THE_HEAT_ON
  Top 0.178: U1.45 23.24,11.52 23.37,11.65 23.37,17.75 23.05,18.07 23.05,18.54 22.77,18.83 22.77,21.65 23.24,22.16 23.24,22.73 23.02,23.02 23.02,26.67 23.27,26.92 25.84,26.92 25.97,26.86 28.29,26.86 28.83,26.51 29.45,26.51 Q2.1 30.17,25.84 Q1.1
THERM_ANALOG  (via drill 0.38, 0.8)
  Top 0.178: MONITOR.P$2 5.94,25.54 5.94,25.89 arc-45 6.06,26.19 6.84,26.19 arc-45 7.25,26.03 C_BM3.1 7.84,25.46 7.57,25.21 arc47 7.37,24.74 7.37,23.34 arc90 7.68,23.11 9.24,23.11 arc90 9.62,23.5 9.62,23.72 arc-90 10.19,24.32 11.24,24.32 arc-90 12.26,23.18 12.26,21.78 13.11,20.93 arc90 v13.24,20.48 | 16.45,15.88 16.07,15.88 v15.72,15.84 | 21.46,16.76 v21.43,16.73
  Top 0.203: U1.61 30.54,9.93 v30.57,9.97 | v30.61,11.62 30.57,11.68 30.29,11.59 24.86,11.59 v24.67,11.94 | THMST_BM.1 16.45,15.88 16.45,16.41 16.73,16.7 16.92,16.7 17.02,16.76 21.46,16.76 21.46,18.35 21.02,18.76 15.91,18.76 15.62,18.99 v15.62,20.67 | R_BM1.1 v13.24,20.48
  Bottom 0.178: 21.46,12.35 21.88,11.94 v24.67,11.94
  Bottom 0.203: v30.57,9.97 v30.61,11.62 | 21.46,12.35 21.46,14.86 21.43,16.22 v21.43,16.73 | v13.24,20.48 13.94,20.54 15.43,20.54 v15.62,20.67
TMS  (via drill 0.38)
  Top 0.178: TC1.5 37.31,5.5 v37.31,6.03 | v28.04,6.51 U1.56
  Bottom 0.178: v37.31,6.03 36.16,5.4 34.92,5.4 34,6.22 33.66,6.51 v28.04,6.51
TX  (via drill 0.38)
  Top 0.178: v37.21,9.94 37.21,12.51 37.5,12.76 39.37,12.76 39.75,13.14 39.75,15.68 40.23,16.16 40.23,16.73 FTDI.TXO
  Top 0.203: U1.2 34.66,10.52 35.21,9.97 35.97,9.24 36.16,9.11 36.39,8.95 36.51,8.86 36.67,8.76 37.05,8.64 v37.91,8.64
  Bottom 0.203: v37.91,8.64 37.85,9.4 v37.21,9.94
VCC  (via drill 0.38)
  Top 0.178: C3.1 3.47,10.45 3.49,10.48 | IC1.P$4 4.24,14.56 3.87,14.19 1.52,14.19 R_CH1.2 | IC1.P$9 7.26,12.71 7.53,12.26
  Top 0.254: D3.C 8.08,19.79 7.29,19.79 7.2,19.79 | 9.42,6.99 R_LED2.2 | 9.38,2.08 R_LED3.2
  Top 0.813: 35.37,18.86 D1.C 35.43,18.86 v35.56,18.73 | v10.48,5.46 10.77,5.08 C4.+
  Bottom 0.508: 34.13,4.54 32.89,4.54
  Bottom 0.61: 32.89,4.54 32.23,4.1
  Bottom 0.711: 38.45,4.54 34.13,4.54
  Bottom 0.762: 40.07,17.37 40.07,8.89
  Bottom 0.813: v35.56,18.73 35.85,18.73 36.39,18.19 39.27,18.19 40.07,17.37 | 40.07,8.89 39.05,7.75 39.05,4.76 38.45,4.54 | 32.23,4.1 30.42,2.73 28.73,2.03 23.91,2.06 19.97,4.76 19.05,5.46 v10.48,5.46
  pour Top (isolate 0.203, no thermals): 13.85,6.94 12.64,6.92 11.78,7.78 11.78,12.03 10.73,13.08 10.73,20.57 10.16,20.57 10.06,21.72 0.1,21.72 0,0.38 2.87,0.38 13.9,0.38
VPCC
  Top 0.178: R_CH1.1 1.37,16.3 R_CH2.1 1.84,17.06 1.84,17.3 2.06,17.53 3.65,17.53 3.84,17.34 3.84,16.07 4.13,15.78 arc45 4.58,15.59 IC1.P$2
(copper drawn outside any net)
  shapes: Bottom circle x1, Top circle x1

## Text on the board
Top: - | + | 1 | 1 | 1 | 1 | gr | 1 | + | -
Bottom: 2012 | pcb: | raphaelabrams.com | BCP-U 1.0 CC-BY | dan@balloonconsulting.com
tNames: a1
tValues: 1k | 1k